# Altium PCB CH32V30xW-R0-1v0.PcbDoc (part 1 of 2)
Units mil, origin at the board's own origin, x right, y up, seen from the top; angles counter-clockwise.
Board outline 3543.31 x 3070.87 mil, 2 copper layers (Top Layer, Bottom Layer); 66 components, 88 nets, 346 pads, 719 vias.
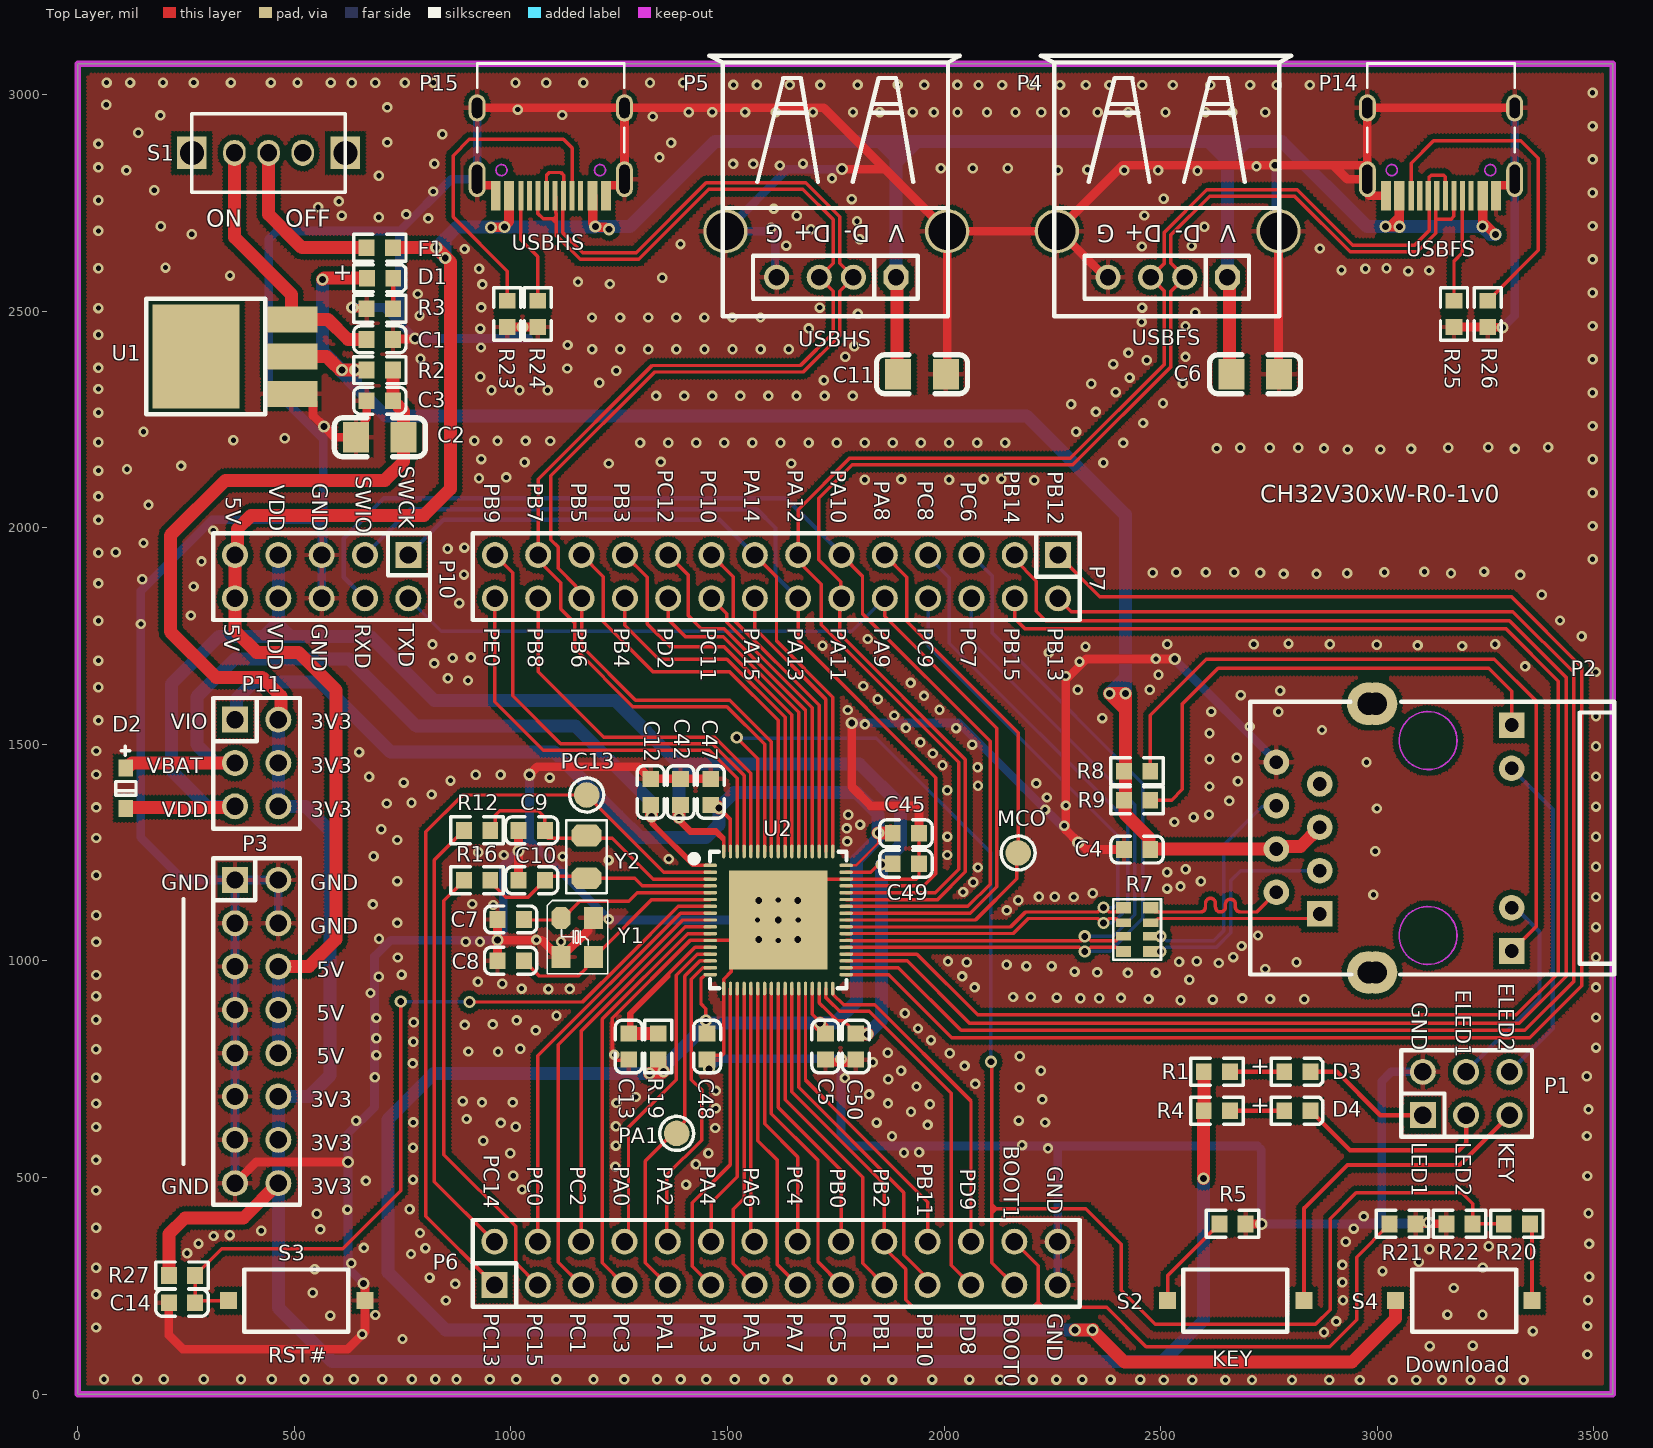
[diagram p0: Top Layer view]
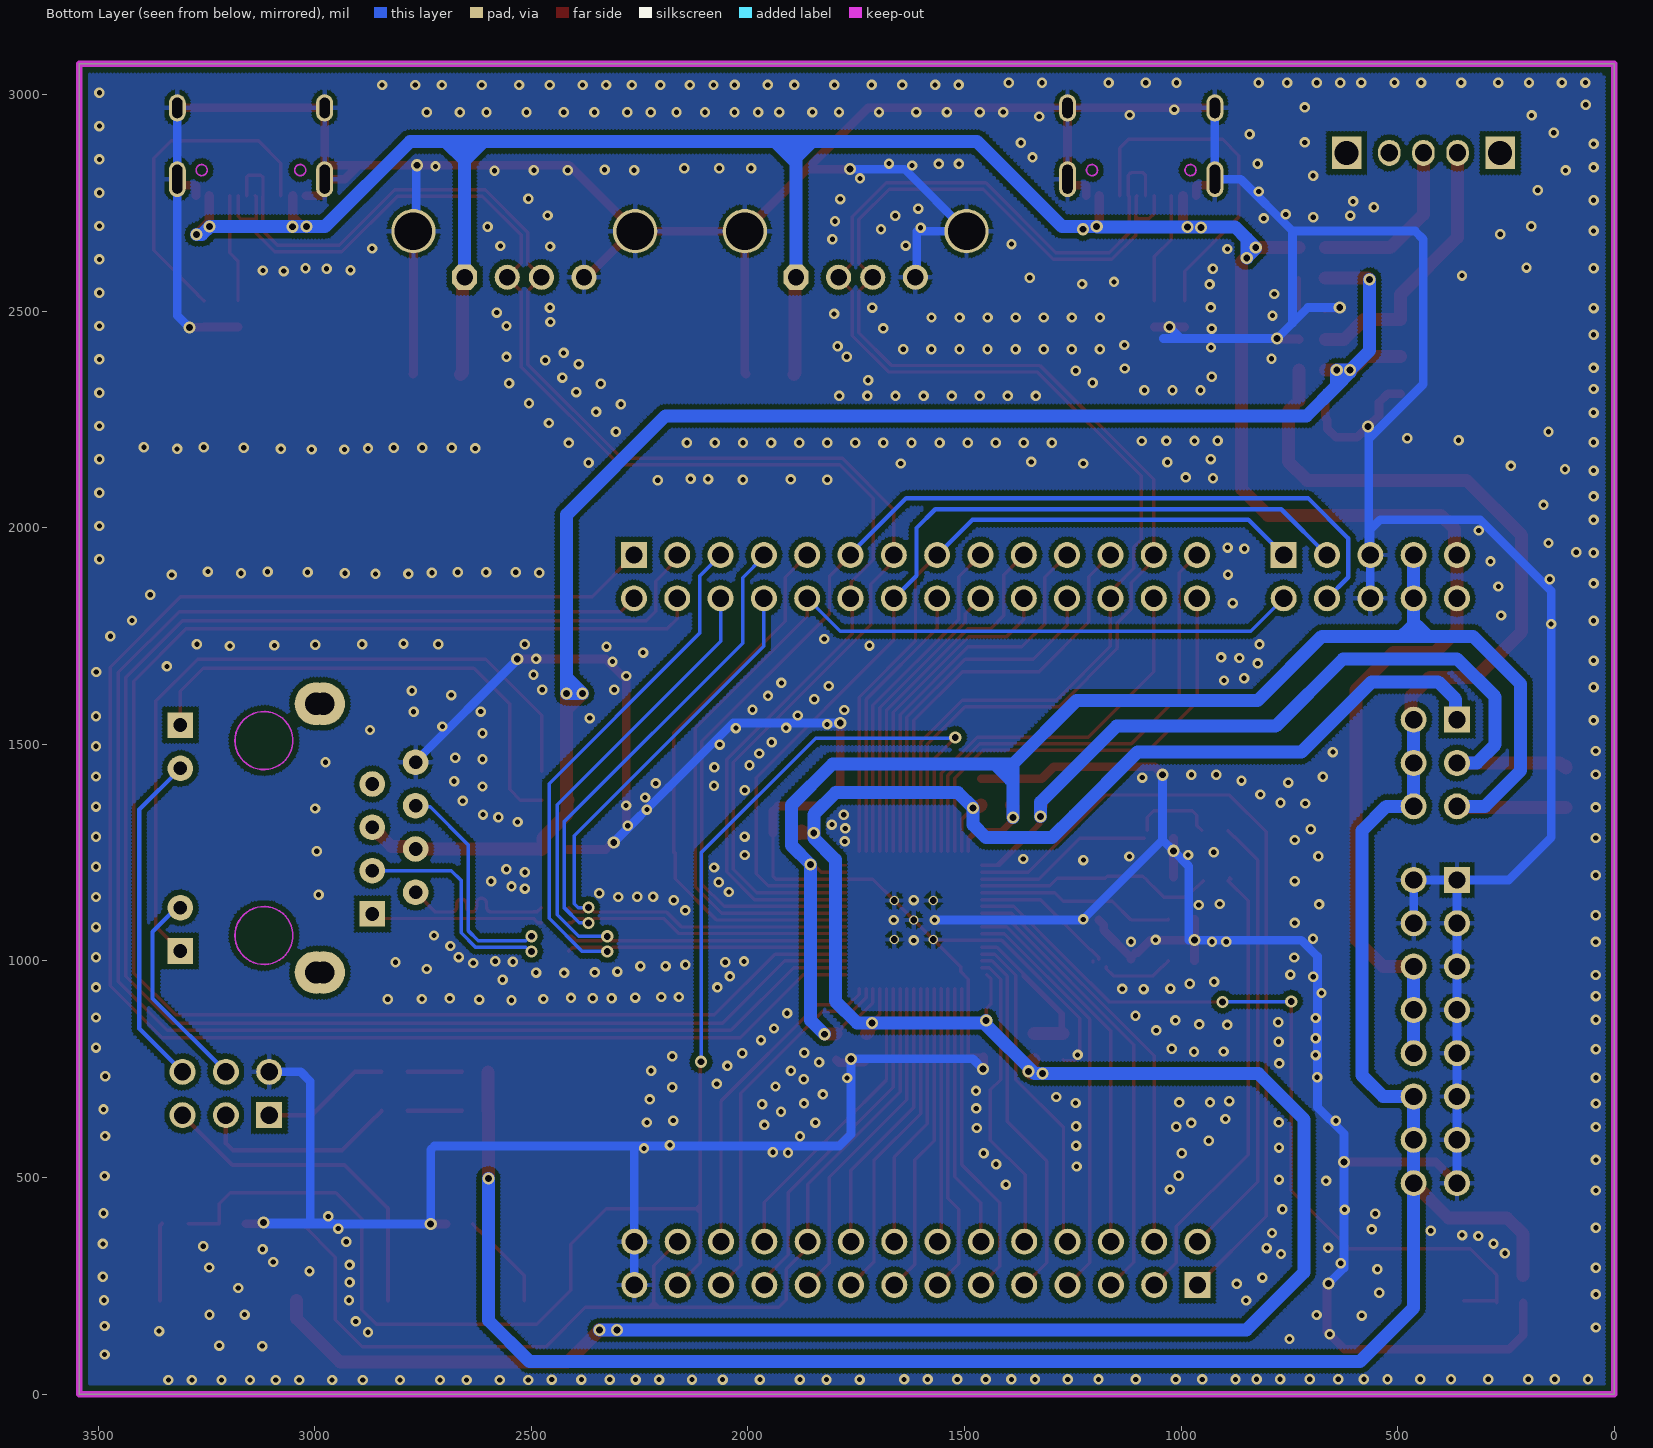
[diagram p1: Bottom Layer view, seen from below]

## Layer stack, top to bottom
Top Solder: solder mask 0.4, Solder Resist, Dk 3.5
Top Layer: signal copper 1.4
Dielectric 1: dielectric 12.6, FR-4, Dk 4.8
Bottom Layer: signal copper 1.4
Bottom Solder: solder mask 0.4, Solder Resist, Dk 3.5

## Board outline
0,0 3543.31,0 3543.31,3070.87 0,3070.87

## Design rules (kind name [scope] priority, off if disabled: settings)
Clearance Clearance_1 [InPolygon] p1: gap=12 ignorepadtopadclearanceinfootprint=FALSE
Clearance [All] p2: gap=7 ignorepadtopadclearanceinfootprint=FALSE
ComponentClearance [All] p1 off: gap=10 collisioncheckmode=3 verticalgap=10 showdistances=FALSE
DiffPairsRouting [All] p1: maxlimit=10 minlimit=7 mostfreqgap=8 toplayer_minwidth=7 toplayer_maxwidth=15 toplayer_prefwidth=8 bottomlayer_minwidth=7 bottomlayer_maxwidth=15 bottomlayer_prefwidth=8 maxuncoupledlength=500
MinimumSolderMaskSliver [All] p1 off: minsoldermaskwidth=10
PolygonConnect PolygonConnect_1 [IsVia] p1: connectstyle=Direct reliefconductorwidth=10 reliefentries=4 polygonreliefangle="90 Angle" airgapwidth=10
PolygonConnect [All] p2: connectstyle=Relief reliefconductorwidth=10 reliefentries=4 polygonreliefangle="90 Angle" airgapwidth=10
RoutingVias [All] p1: holewidth=16 width=28 viastyle="Through Hole" minholewidth=12 minwidth=24 maxholewidth=28 maxwidth=50
SilkToSilkClearance [All] p1 off: silktosilkclearance=10
SilkToSolderMaskClearance [IsPad] p1 off: minsilkscreentomaskgap=10 clearancetoexposedcopper=TRUE
SolderMaskExpansion [All] p1: expansion=4 istentingtop=FALSE
Width [All] p1: maxlimit=100 minlimit=6 preferedwidth=10
25 further rules are at their usual default settings.

## Classes and differential pairs
differential pair NewDifferentialPair6: +PB7 -PB6
differential pair NewDifferentialPair5: +PA12 -PA11
differential pair NewDifferentialPair4: +ERXN1 -ERXP1
differential pair NewDifferentialPair3: +ETXN1 -ETXP1
differential pair NewDifferentialPair2: +ERXN -ERXP
differential pair NewDifferentialPair1: +ETXN -ETXP

## Components (designator, comment, footprint, x,y, rotation, side; value= is the part's Value field where it differs from the comment)
C1 "0.1uF" 0603_C 667.02,2434.74 r0 top
C2 "10uF" 3216_C 752.33,2208.79 r0 top
C3 "0.1uF" 0603_C 727.65,2293.47 r180 top
C4 "1uF" 0603_C 2415.29,1257.18 r0 top
C5 "0.1uF" 0603_C 1726.06,772.13 r90 top
C6 "10uF" 3216_C 2663,2354.26 r180 top
C7 "22pF" 0603_C 969.2,1095.74 r0 top
C8 "22pF" 0603_C 969.2,1000.46 r0 top
C9 "12pF" 0603_C 1017.69,1301.31 r0 top
C10 "12pF" 0603_C 1017.69,1186.19 r0 top
C11 "10uF" 3216_C 1894,2354.26 r180 top
C12 "0.1uF" 0603_C 1322.64,1420.35 r270 top
C13 "0.1uF" 0603_C 1272.27,832.76 r270 top
C14 "0.1uF" 0603_C 210.37,211 r0 top
C42 "0.1uF" 0603_C 1391.63,1420.35 r270 top
C45 "0.1uF" 0603_C 1881.48,1294.49 r0 top
C47 "0.1uF" 0603_C 1461.63,1359.72 r90 top
C48 "0.1uF" 0603_C 1452.92,832.76 r270 top
C49 "0.1uF" 0603_C 1942.11,1224.49 r180 top
C50 "0.1uF" 0603_C 1796.06,832.76 r270 top
D1 "RED" 0603+ 667.71,2576.01 r0 top
D2 "B0520WS" SOD-323 111,1444.91 r270 top
D3 "BLUE" 0603+ 2785.11,743.99 r0 top
D4 "RED" 0603+ 2785.11,653.99 r0 top
F1 "500mA" 0603 727.65,2646.64 r180 top
MCO "Testpoint" TESTPOINT1 2170.88,1249.31 r0 top
P1 "IO" IDC6-2.54mm 3105.11,643.99 r0 top
P2 "HR911105A" HR911105A 2867.11,1108.49 r90 top
P3 "Ppin" IDC16-2.54mm 363.11,1186.99 r0 top
P4 "USBFS" USBAF 2654,2578.25 r180 top
P5 "USBHS" USBAF 1889,2578.25 r180 top
P6 "HEADER 14x2" IDC28-2.54MM 962.11,251.99 r90 top
P7 "HEADER 14x2" IDC28-2.54MM 2263.11,1936.99 r270 top
P10 "LINK" IDC10-2.54mm 363.11,1936.99 r270 top
P11 "Psel" IDC6-2.54mm 363.11,1556.99 r270 top
P14 "USBFS" TYPE-C-Receptacle-2.0 3147.18,2766.56 r180 top
P15 "USBHS" TYPE-C-Receptacle-2.0 1092.03,2766.56 r180 top
PA1 "Testpoint" TESTPOINT1 1382.65,601.9 r0 top
PC13 "Testpoint" TESTPOINT1 1174.94,1383.09 r0 top
R1 "1K" 0603 2599.48,743.99 r0 top
R2 "0R" 0603 727.65,2364.1 r180 top
R3 "1K" 0603 727.65,2505.37 r180 top
R4 "1K" 0603 2599.48,653.99 r0 top
R5 "10K" 0603 2696,392.95 r180 top
R7 "0Ω" 8P4R-0603 2445.6,1072.43 r270 top
R8 "1K" 0603 2415.29,1437.8 r0 top
R9 "1K" 0603 2415.29,1371.1 r0 top
R12 "NC(0R)" 0603 891.69,1301.31 r0 top
R16 "NC(0R)" 0603 891.69,1186.19 r0 top
R19 "0R" 0603 1339.92,772.13 r90 top
R20 "1K" 0603 3291.86,392.95 r0 top
R21 "10K" 0603 3028,392.95 r0 top
R22 "10K" 0603 3220,392.95 r180 top
R23 "5.1K" 0603 991.75,2523.92 r270 top
R24 "5.1K" 0603 1062.11,2523.92 r270 top
R25 "5.1K" 0603 3177.11,2523.88 r270 top
R26 "5.1K" 0603 3255.21,2523.88 r270 top
R27 "10K" 0603 271,274 r180 top
S1 "SW SPDT" KEY2 440.58,2865.37 r0 top
S2 "KEY" SMD_6.1x3.65x2.5mm-KEY 2830.75,215.99 r180 top
S3 "RST#" SMD_6.1x3.65x2.5mm-KEY 663.07,215.99 r180 top
S4 "Download" SMD_6.1x3.65x2.5mm-KEY 3042,215.99 r0 top
U1 "1117-3.3V" SOT-223 493.11,2309.25 r90 top
U2 "CH32V307W" QFN68_8x8 1617.11,1094.49 r270 top
Y1 "8MHz" XT3225 1115.58,1099.48 r270 top
Y2 "32768Hz" FC-135 1174.48,1289.69 r270 top

## Footprints (in the part's own frame and the unit in brackets; to place one, negate y for a bottom-side part, rotate by r counter-clockwise, add the part's x,y. Pads: shape width x height; smd on the part's side, far side on the other; paste and mask are expansions set on the pad)
8P4R-0603 [mm]
  rect 0.65x0.9 smd: 1(-1.28,-0.8) 4(1.28,-0.8) 5(1.28,0.8) 8(-1.28,0.8)
  rect 0.5x0.9 smd: 2(-0.4,-0.8) 3(0.4,-0.8) 6(0.4,0.8) 7(-0.4,0.8)
  silkscreen extent -1.78,-1.4 1.78,1.4, body extent -1.6,-0.8 1.6,0.8, height 0.6
0603 [mm]
  rect 0.93x0.98 smd: 1(0,0) 2(1.54,0)
  silkscreen extent -0.76,-0.79 2.3,0.79
0603+ [mm]
  rect 0.93x0.98 smd: 1(0,0) 2(1.54,0)
  silkscreen extent -0.76,-0.79 2.27,0.79
0603_C [mm]
  rect 0.93x0.98 smd: 1(0,0) 2(1.54,0)
  silkscreen extent -0.76,-0.79 2.31,0.79
3216_C [mil]
  rect 60x70 smd: 1(0,0) 2(-110,0)
  silkscreen extent -160,-45 50,45
FC-135 [mil]
  oct 50x70 smd: 1(0,0) 2(98.43,0)
  silkscreen extent -35,-47 133,47
HR911105A [mm]
  rect 1.5x1.5 hole 0.8: 1(0,0) 9(-2.175,-11.252) 12(11.075,-11.252)
  round 1.5 hole 0.8: 2(1.27,2.54) 3(2.54,0) 4(3.81,2.54) 5(5.08,0) 6(6.35,2.54) 7(7.62,0) 8(8.89,2.54) 10(0.365,-11.252) 11(8.535,-11.252)
  round 2.5 hole 1.3: ""(-3.43,-2.852) ""(-3.43,-3.3) ""(12.32,-3.3) ""(12.32,-2.852)
  Keep-Out Layer circle w0.1: c10.165,-6.352 r1.7
  Keep-Out Layer circle w0.1: c-1.265,-6.352 r1.7
  silkscreen extent -3.55,-17.27 12.45,4.06
IDC6-2.54mm [mil]
  rect 60x60 hole 40: 1(0,0)
  round 60 hole 40: 2(0,100) 3(100,0) 4(100,100) 5(200,0) 6(200,100)
  silkscreen extent -50,-50 252,150
IDC10-2.54mm [mil]
  rect 60x60 hole 40: 1(0,400)
  round 60 hole 40: 2(100,400) 3(0,300) 4(100,300) 5(0,200) 6(100,200) 7(0,100) 8(100,100) 9(0,0) 10(100,0)
  silkscreen extent -50,-50 150,450
IDC16-2.54mm [mil]
  rect 60x60 hole 40: 1(0,0)
  round 60 hole 40: 2(100,0) 3(0,-100) 4(100,-100) 5(0,-200) 6(100,-200) 7(0,-300) 8(100,-300) 9(0,-400) 10(100,-400) 11(0,-500) 12(100,-500) 13(0,-600) 14(100,-600) 15(0,-700) 16(100,-700)
  silkscreen extent -50,-750 150,50
IDC28-2.54MM [mil]
  rect 60x60 hole 40: 1(0,0)
  round 60 hole 40: 2(100,0) 3(0,-100) 4(100,-100) 5(0,-200) 6(100,-200) 7(0,-300) 8(100,-300) 9(0,-400) 10(100,-400) 11(0,-500) 12(100,-500) 13(0,-600) 14(100,-600) 15(0,-700) 16(100,-700) 17(0,-800) 18(100,-800) 19(0,-900) 20(100,-900) 21(0,-1000) 22(100,-1000) 23(0,-1100) 24(100,-1100) 25(0,-1200) 26(100,-1200) 27(0,-1300) 28(100,-1300)
  silkscreen extent -50,-1351 150,50
KEY2 [mm]
  rect 1.75x1.9 hole 1.4: 0(-4.5,0) 0(4.5,0)
  oval 1.321x1.524 hole 1.016: 1(0,0) 2(-2,0) 3(2,0)
  silkscreen extent -4.51,-2.31 4.5,2.29
QFN68_8x8 [mm]
  round 0.559 hole 0.406: 0(-1.143,1.143) 0(-1.143,-1.143) 0(0,0) 0(1.143,1.143) 0(1.143,-1.143)
  rect 5.8x5.8 smd: 0(0,0)
  oval 0.2x0.8 smd: 1(-3.2,-3.982) 2(-2.8,-3.982) 3(-2.4,-3.982) 4(-2,-3.982) 5(-1.6,-3.982) 6(-1.2,-3.982) 7(-0.8,-3.982) 8(-0.4,-3.982) 9(0,-3.982) 10(0.4,-3.982) 11(0.8,-3.982) 12(1.2,-3.982) 13(1.6,-3.982) 14(2,-3.982) 15(2.4,-3.982) 16(2.8,-3.982) 17(3.2,-3.982) 35(3.2,3.982) 36(2.8,3.982) 37(2.4,3.982) 38(2,3.982) 39(1.6,3.982) 40(1.2,3.982) 41(0.8,3.982) 42(0.4,3.982) 43(0,3.982) 44(-0.4,3.982) 45(-0.8,3.982) 46(-1.2,3.982) 47(-1.6,3.982) 48(-2,3.982) 49(-2.4,3.982) 50(-2.8,3.982) 51(-3.2,3.982)
  oval 0.8x0.2 smd: 18(4.018,-3.2) 19(4.018,-2.8) 20(4.018,-2.4) 21(4.018,-2) 22(4.018,-1.6) 23(4.018,-1.2) 24(4.018,-0.8) 25(4.018,-0.4) 26(4.018,0) 27(4.018,0.4) 28(4.018,0.8) 29(4.018,1.2) 30(4.018,1.6) 31(4.018,2) 32(4.018,2.4) 33(4.018,2.8) 34(4.018,3.2) 52(-4.018,3.2) 53(-4.018,2.8) 54(-4.018,2.4) 55(-4.018,2) 56(-4.018,1.6) 57(-4.018,1.2) 58(-4.018,0.8) 59(-4.018,0.4) 60(-4.018,0) 61(-4.018,-0.4) 62(-4.018,-0.8) 63(-4.018,-1.2) 64(-4.018,-1.6) 65(-4.018,-2) 66(-4.018,-2.4) 67(-4.018,-2.8) 68(-4.018,-3.2)
  silkscreen extent -4,-5.13 4,4
SMD_6.1x3.65x2.5mm-KEY [mm]
  rect 1x1 smd: 1(0,0) 2(8,0)
  silkscreen extent 0.98,-1.83 7.08,1.83
SOD-323 [mm]
  rect 1x0.83 smd: 1(0,0) 2(2.36,0)
  silkscreen extent -1.28,-0.6 1.58,0.6
SOT-223 [mil]
  rect 60x120 smd: 1(0,0) 2(86,0) 3(172,0)
  rect 240x200 smd: ""(86,220)
  silkscreen extent -47,60 219,335
TESTPOINT1 [mm]
  round 1.5 smd: 1(0,0)
  silkscreen extent -1,-1 1,1
TYPE-C-Receptacle-2.0 [mm]
  oval 1x2.1 hole 0.6 slot 1.7 at 90 deg: 0(-4.32,-0.97) 0(4.32,-0.97)
  oval 1x1.6 hole 0.6 slot 1.2 at 90 deg: 0(-4.32,-5.15) 0(4.32,-5.15)
  rect 0.584x1.75 smd: A1(-3.225,0) B1(3.225,0)
  rect 0.6x1.75 smd: A4(-2.45,0) B4(2.45,0)
  rect 0.3x1.75 smd: A5(-1.25,0) A6(-0.25,0) A7(0.25,0) A8(1.25,0) B5(1.75,0) B6(0.75,0) B7(-0.75,0) B8(-1.75,0)
  Keep-Out Layer circle w0.1: c2.89,-1.5 r0.325
  Keep-Out Layer circle w0.1: c-2.89,-1.5 r0.325
  silkscreen extent -4.32,-7.75 4.32,-2.55
USBAF [mm]
  round 2.6 hole 2.2: 0(-3,-2.7) 0(10,-2.7)
  oct 1.473x1.473 hole 0.965: 1(0,0)
  round 1.473 hole 0.965: 2(2.5,0) 3(4.5,0) 4(7,0)
  silkscreen extent -3.75,-12.99 10.95,2.29
XT3225 [mm]
  oct 1.3x1.1 smd: 1(0,0)
  rect 1.3x1.1 smd: 2(2.3,0) 3(2.3,1.9) 4(0,1.9)
  silkscreen extent -1.02,-0.8 3.27,2.74

## Part data
C1 C2 C3 C4 C5 C6 C7 C8 C9 C10 C11 C12 C13 C14 C42 C45 C47 C48 C49 C50: library part CAP, "Capacitor"
D1 D3 D4: library part LED0, "Typical INFRARED GaAs LED", LatestRevisionDate=08-Jul-2005, LatestRevisionNote="Mech Layer 1 removed.", PackageDescription="LED; 2 Leads", PackageReference=LED-0, Published=8-Jun-2000, Publisher="Altium Limited"
D2: library part DIODE, "Diode"
F1: library part FUSE1, "Fuse"
MCO PA1 PC13: "测试点"
P1 P11: library part "Header 3X2H", "Header, 3-Pin, Dual row, Right Angle", LatestRevisionDate=17-Jul-2002, LatestRevisionNote="Re-released for DXP Platform.", Publisher="Altium Limited"
P3: library part "Header 8X2H", "Header, 8-Pin, Dual row, Right Angle", LatestRevisionDate=17-Jul-2002, LatestRevisionNote="Re-released for DXP Platform.", Publisher="Altium Limited"
P4 P5: library part USB, "USB Port"
P6 P7: "Header, 14-Pin, Dual row"
P10: library part "Header 5X2H", "Header, 5-Pin, Dual row, Right Angle", LatestRevisionDate=17-Jul-2002, LatestRevisionNote="Re-released for DXP Platform.", Publisher="Altium Limited"
P14 P15: library part TYPE-C1
R1 R2 R3 R4 R5 R8 R9 R12 R16: library part RES
R7: library part R-8P4R, "贴片网络排阻", BOM名称=贴片网络排阻, 学习资源=www.ooocke.com, 版权归属=源创客
R19: library part R
R20 R21 R22 R23 R24 R25 R26 R27: library part Res2, "Resistor"
  R20 R21 R22 R27: LatestRevisionDate=17-Jul-2002, LatestRevisionNote="Re-released for DXP Platform.", PackageReference=AXIAL-0.4, Published=8-Jun-2000, Publisher="Altium Limited"
S2 S3 S4: library part KEY1
U2: "RISC-V FPU HD-MCU, 144MHz, USB_480M, USB OTG, 1000M Ethernet MAC, 2*CAN"
Y1 Y2: library part XTAL, "Crystal Oscillator", LatestRevisionDate=17-Jul-2002, LatestRevisionNote="Re-released for DXP Platform.", PackageDescription="Crystal, Thru-Hole; 2 Leads; Body 3.1 x 8.2 mm (Dia.xH)", PackageReference=R38, Published=8-Jun-2000, Publisher="Altium Limited"

## Via types
v1: diameter 24, hole 12, Top Layer to Bottom Layer, tented both sides, 662 vias
v2: diameter 28, hole 16, Top Layer to Bottom Layer, tented both sides, 57 vias

## Nets (pads, with @x,y where several pads share a name; then routed paths per layer and width w, separated by ;. In a path a pad name is that pad's centre, name@x,y a point inside that pad or via, vN(x,y) a via of type N, cw(c..) or ccw(c..) an arc to the next point about the centre after c; other vN are vias at no path point)
3V3: C2.1 C3.1 P3.12 P3.14 P3.16 P11.2 P11.4 P11.6 R1.1 R2.1 R4.1 R27.2 | length 6141.7
  Top Layer w30: R27.2@210.37,274 210.37,369.46 247.61,406.7 382.82,406.7 P3.16@463.11,486.99 ; P11.2@463.11,1556.99 468.85,1562.73 468.85,1611.71 425.83,1654.72 319.19,1654.72 213.93,1759.98 213.93,1982.33 340.98,2109.39 709.01,2109.39 752.33,2152.71 752.33,2268.78 C3.1@739.15,2281.96 ; C3.1@727.65,2293.47 R2.1@727.65,2364.1 ; v2(2599,498) 2599,653.51 R4.1@2599.48,653.99 R1.1@2599.48,743.99
  Bottom Layer w30: P11.2@463.11,1556.99 P11.4@463.11,1456.99 P11.6@463.11,1356.99 526.07,1356.99 581.87,1301.18 581.87,735.23 533.64,686.99 P3.12@463.11,686.99 P3.14@463.11,586.99 P3.16@463.11,486.99 463.11,199.11 586.51,75.7 2504.71,75.7 2599,170 v2(2599,498)
3V3S: C4.2 D1.1 P2.4 P2.5 R2.2 R8.1 R9.1 U1.2 | length 3960
  Top Layer w30: U1.2@493.11,2395.25 574.64,2395.25 586.53,2383.35 v2@605.78,2364.1 ; v2(565.05,2572.76) 568.29,2576.01 D1.1@667.71,2576.01 ; v2@610.13,2364.1 v2(640.74,2364.1) R2.2@667.02,2364.1 ; P2.5@2867.11,1308.49 2822.67,1264.05 2772.67,1264.05 P2.4@2767.11,1258.49 2766.45,1257.84 2476.58,1257.84 C4.2@2475.92,1257.18 2472.61,1260.48 2472.61,1284.28 2418.05,1338.84 2418.05,1368.34 R9.1@2415.29,1371.1 2418.43,1374.24 2418.43,1580.33 ; 2418.43,1580.33 2381.67,1617.09 v2(2418.43,1617.09) 2418.43,1580.33
  Bottom Layer w30: v2(565.05,2572.76) 565.05,2408.9 v2@609.85,2364.1 ; 660.35,2308.3 640.74,2327.91 ; v2@2381.67,1617.09 v2(2418.43,1617.09) 2418.43,1653.92 ; v2(2381.63,1617.12) 2418.43,1653.92 ; 2418.43,1665.86 2418.43,1653.92 ; v2@609.85,2364.1 v2(640.74,2364.1) 640.74,2327.91 ; v2@609.85,2364.1 v2(610.13,2363.83) 610.13,2358.53 640.74,2327.91 ; 640.74,2327.91 710.58,2258.07 2190.61,2258.07 2418.43,2030.26 2418.43,1653.92
5V: C6.1 C11.1 F1.1 P3.6 P3.8 P3.10 P4.1 P5.1 P10.9 P10.10 P14.A4 P14.B4 P15.A4 P15.B4 | length 7185.9
  Top Layer w22: v2(953.69,2693.18) 954.19,2693.67 984.94,2693.67 v2(985.43,2694.17) 985.43,2695.79 995.57,2705.93 P15.B4@995.57,2766.56 ; P15.A4@1188.48,2766.56 1188.48,2702.96 1194.82,2696.62 v2(1194.82,2695) 1195.97,2693.85 1218.74,2693.85 1223.46,2689.13 v2@1225.08,2689.13 ; P14.B4@3050.73,2766.56 3050.94,2766.34 3050.94,2717.1 ; v2(3051.15,2694.85) v2@3050.94,2695.06 ; v2(3242.64,2695.12) 3243.64,2696.12 v2@3243.64,2705.84 ; P14.A4@3243.64,2766.56 v2@3243.64,2705.84 ; v2(3272.47,2677.01) v2@3243.64,2705.84 ; v2@3050.94,2695.06 3050.74,2695.26 3019.75,2695.26 v2(3019.34,2695.67) 3020.49,2696.82 3030.67,2696.82 3050.94,2717.1 ; v2@3050.94,2695.06 3050.94,2717.1
  Top Layer w30: P3.6@463.11,986.99 533.66,986.99 596.24,1049.56 596.24,1625.97 509.67,1712.54 413.13,1712.54 363.11,1762.57 P10.10@363.11,1836.99 P10.9@363.11,1936.99 368.85,1942.73 368.85,1996.92 400.58,2028.66 799.33,2028.66 860.57,2089.9 860.57,2613.75 v2(827.68,2646.64) F1.1@727.65,2646.64 ; P5.1@1889,2578.25 1891.5,2575.75 1891.5,2356.76 C11.1@1894,2354.26 ; P4.1@2654,2578.25 2658.5,2573.75 2658.5,2358.76 C6.1@2663,2354.26
  Bottom Layer w22: v2@827.68,2645.02 v2(827.68,2646.64) ; v2@847.22,2625.47 847.22,2623.83 v2(848.37,2622.69) ; v2@1194.4,2694.58 v2(1194.82,2695) ; 2654,2887.75 2657.65,2891.4 ; v2(3051.15,2694.85) v2@3051.42,2695.12
  Bottom Layer w30: P3.10@463.11,786.99 P3.8@463.11,886.99 P3.6@463.11,986.99 ; v2@827.68,2645.02 v2@847.22,2625.47 ; v2(827.68,2646.64) 848.37,2667.33 ; v2(848.37,2622.69) 848.37,2667.33 ; 1025.43,2694.17 v2(985.43,2694.17) 875.21,2694.17 848.37,2667.33 ; 1025.43,2694.58 v2@1194.4,2694.58 ; v2(1194.82,2695) 1274.51,2695 1470.92,2891.4 1852.12,2891.4 ; 1867.42,2891.4 1875.56,2891.4 ; P5.1@1889,2578.25 1888.74,2578.51 1888.74,2842.78 ; 2607.05,2891.4 2610.75,2891.4 ; P4.1@2654,2578.25 2654,2848.16 ; 2654,2887.75 2654,2848.16 ; 2654,2891.4 2610.75,2891.4 ; 2657.65,2891.4 2697.24,2891.4 ; 2697.71,2891.4 2697.24,2891.4 ; v2(3051.15,2694.85) 2976.6,2694.85 2780.04,2891.4 2697.24,2891.4 ; v2@3051.42,2695.12 v2(3242.64,2695.12) 3260.74,2677.01 v2(3272.47,2677.01) ; 1852.12,2891.4 1875.56,2891.4 ; 1852.12,2891.4 1888.74,2854.78 ; 1875.56,2891.4 1937.36,2891.4 ; 1875.56,2891.4 1888.74,2878.22 1888.74,2854.78 ; 1888.74,2842.78 1888.74,2854.78 ; 1888.74,2842.78 1937.36,2891.4 ; 1937.36,2891.4 2610.75,2891.4 ; 2610.75,2891.4 2654,2848.16 ; 2654,2848.16 2697.24,2891.4
  other v2: 1226.08,2689.13
BOOT0: P6.25 R20.1 R22.1 U2.63 | length 3691.4
  Top Layer w8: v2(1521.35,1515.67) 1569.86,1467.16 U2.63@1569.86,1252.67 ; v2@2110.39,767.35 2110.39,438.11 2110.39,427.91 ; 2110.46,441.14 2110.46,438.11 2120.65,427.91 ; P6.25@2162.11,251.99 2110.39,303.71 2110.39,417.65 ; R20.1@3291.86,392.95 R22.1@3220,392.95 3220,439.33 3194.71,464.63 2950.92,464.63 2891.27,404.98 2891.27,194.95 2857.35,161.04 2487,161.04 2408.57,239.46 2408.57,346.35 2327.01,427.91 2120.65,427.91 ; 2110.39,417.65 2110.39,427.91 ; 2110.39,417.65 2120.65,427.91 ; 2110.39,427.91 2120.65,427.91
  Bottom Layer w8: v2(1521.35,1515.67) 1522.77,1514.25 1843.55,1514.25 2108.23,1249.56 v2(2108.23,767.35)
BOOT1: P6.20 P6.26 R21.1 U2.28 | length 2400.7
  Top Layer w8: U2.28@1648.6,936.31 1648.6,697.65 1862.11,484.15 1862.11,337.99 1911.35,288.74 1911.35,218.04 1929.15,200.25 2204.74,200.25 ; P6.26@2162.11,351.99 2217.45,296.65 2217.45,211.82 ; 2216.31,211.82 2204.74,200.25 ; 2230.97,200.56 2228.7,200.56 2217.45,211.82 ; R21.1@3028,392.95 3028,391.96 2952.42,316.39 2952.42,171.52 2890.5,109.59 2466.11,109.59 2375.46,200.25 2228.7,200.25 2217.45,200.25 ; 2204.74,200.25 2217.45,200.25 ; 2217.45,200.25 2217.45,211.82
ELED1: P1.4 P2.10 | length 481
  Bottom Layer w10: P1.4@3205.11,743.99 3374.55,913.43 3374.55,1067.28 3318.97,1122.86 P2.10@3310.1,1122.86
ELED2: P1.6 P2.11 | length 781.4
  Bottom Layer w10: P1.6@3305.11,743.99 3405.17,844.06 3405.17,1349.44 P2.11@3310.1,1444.52
ERXN: P7.6 R7.3 U2.40 | length 1664.3
  Top Layer w8: U2.40@1773.89,1047.24 1785.57,1047.24 1785.95,1046.87 v2@2317.7,1046.87 ; v2(2324.72,1056.86) 2328.24,1056.86 2338.24,1046.86 2396.87,1046.86 2400.39,1050.37 2400.39,1050.84 2406.23,1056.68 R7.3@2414.11,1056.68
  Bottom Layer w8: P7.6@2063.11,1836.99 2063.11,1737.7 2439.92,1360.88 2439.92,1106.35 2390.43,1056.86 v2(2324.72,1056.86)
ERXN1: P2.6 R7.6 | length 523.7
  Top Layer w8: v2(2499.37,1056.94) 2505.17,1056.94 v2@2505.75,1056.36
  Bottom Layer w8: v2(2499.37,1056.94) 2502.89,1056.94 2512.89,1046.94 2568.69,1046.94 2568.77,1046.86 2622.68,1046.86 2646.06,1070.24 2646.06,1268.46 2733.09,1355.49 2764.1,1355.49 P2.6@2767.11,1358.49
ERXP: P7.5 R7.4 U2.39 | length 1803.6
  Top Layer w8: U2.39@1773.89,1031.5 1785.57,1031.5 1785.95,1031.87 2311.49,1031.87 ; v2(2324.72,1021.86) 2328.24,1021.86 2338.24,1031.86 2396.87,1031.86 2397.9,1030.83 2405.31,1030.83 R7.4@2414.11,1022.04
  Bottom Layer w8: P7.5@2063.11,1936.99 2111.65,1888.44 2111.65,1756.64 2152.15,1716.14 2458.98,1409.32 2458.98,1098.8 2382.03,1021.86 v2(2324.72,1021.86)
ERXP1: P2.3 R7.5 | length 522.6
  Top Layer w8: v2(2499.37,1021.94) 2505.33,1021.94 v2@2505.75,1022.36
  Bottom Layer w8: v2(2499.37,1021.94) 2502.89,1021.94 2512.89,1031.94 2562.48,1031.94 2562.56,1031.86 2628.89,1031.86 2661.65,1064.62 2661.65,1185.75 2684.4,1208.49 P2.3@2867.11,1208.49
ETXN: P7.8 R7.1 U2.42 | length 1590
  Top Layer w8: U2.42@1773.89,1078.74 1785.57,1078.74 1785.95,1078.37 2153.25,1078.37 2187.88,1113 2354.52,1113 2364.52,1123 v2(2368.03,1123) 2371.55,1123 2381.55,1113 2396.87,1113 2397.9,1114.03 2405.31,1114.03 R7.1@2414.11,1122.82
  Bottom Layer w8: P7.8@1963.11,1836.99 1963.11,1726.66 2400.92,1288.85 2400.92,1132.02 2391.9,1123 v2(2368.03,1123)
ETXN1: P2.2 R7.8 | length 395.9
  Top Layer w8: R7.8@2477.1,1122.82 2485.89,1114.03 2493.3,1114.03 2494.33,1113 2587.97,1113 2591.97,1113 ccw(c2591.97,1124.5) 2603.47,1124.5 2603.47,1133.09 cw(c2614.97,1133.09) 2626.47,1133.09 2626.47,1124.5 ccw(c2637.97,1124.5) 2649.47,1124.5 2649.47,1131.14 cw(c2660.97,1131.14) 2672.47,1131.14 2672.47,1124.5 ccw(c2683.97,1124.5) 2683.97,1113 2703.24,1113 2721.61,1113 P2.2@2767.11,1158.49
ETXP: P7.7 R7.2 U2.41 | length 1742.4
  Top Layer w8: U2.41@1773.89,1062.99 1785.57,1062.99 1785.95,1063.37 2159.46,1063.37 2194.1,1098 2354.52,1098 2364.52,1088 v2(2368.03,1088) 2371.55,1088 2381.55,1098 2396.87,1098 2400.39,1094.49 2400.39,1094.02 2406.23,1088.18 R7.2@2414.11,1088.18
  Bottom Layer w8: P7.7@1963.11,1936.99 1963.11,1933.67 2012.27,1884.5 2012.27,1733.32 2423.46,1322.13 2423.46,1122.16 2389.3,1088 v2(2368.03,1088)
ETXP1: P2.1 R7.7 | length 398.7
  Top Layer w8: R7.7@2477.1,1088.18 2484.97,1088.18 2490.81,1094.02 2490.81,1094.49 2494.33,1098 2856.61,1098 P2.1@2867.11,1108.49